# Altium PCB MCU098_MSPM0G3507_PCB.PcbDoc (part 3 of 5)
Units mil, origin at the board's own origin, x right, y up, seen from the top; angles counter-clockwise.
Board outline 2310.03 x 4205.03 mil, 4 copper layers (Top Layer, VCC Layer, GND Layer, Bottom Layer), stack 62.4 mil thick; 260 components, 182 nets, 835 pads, 237 vias.
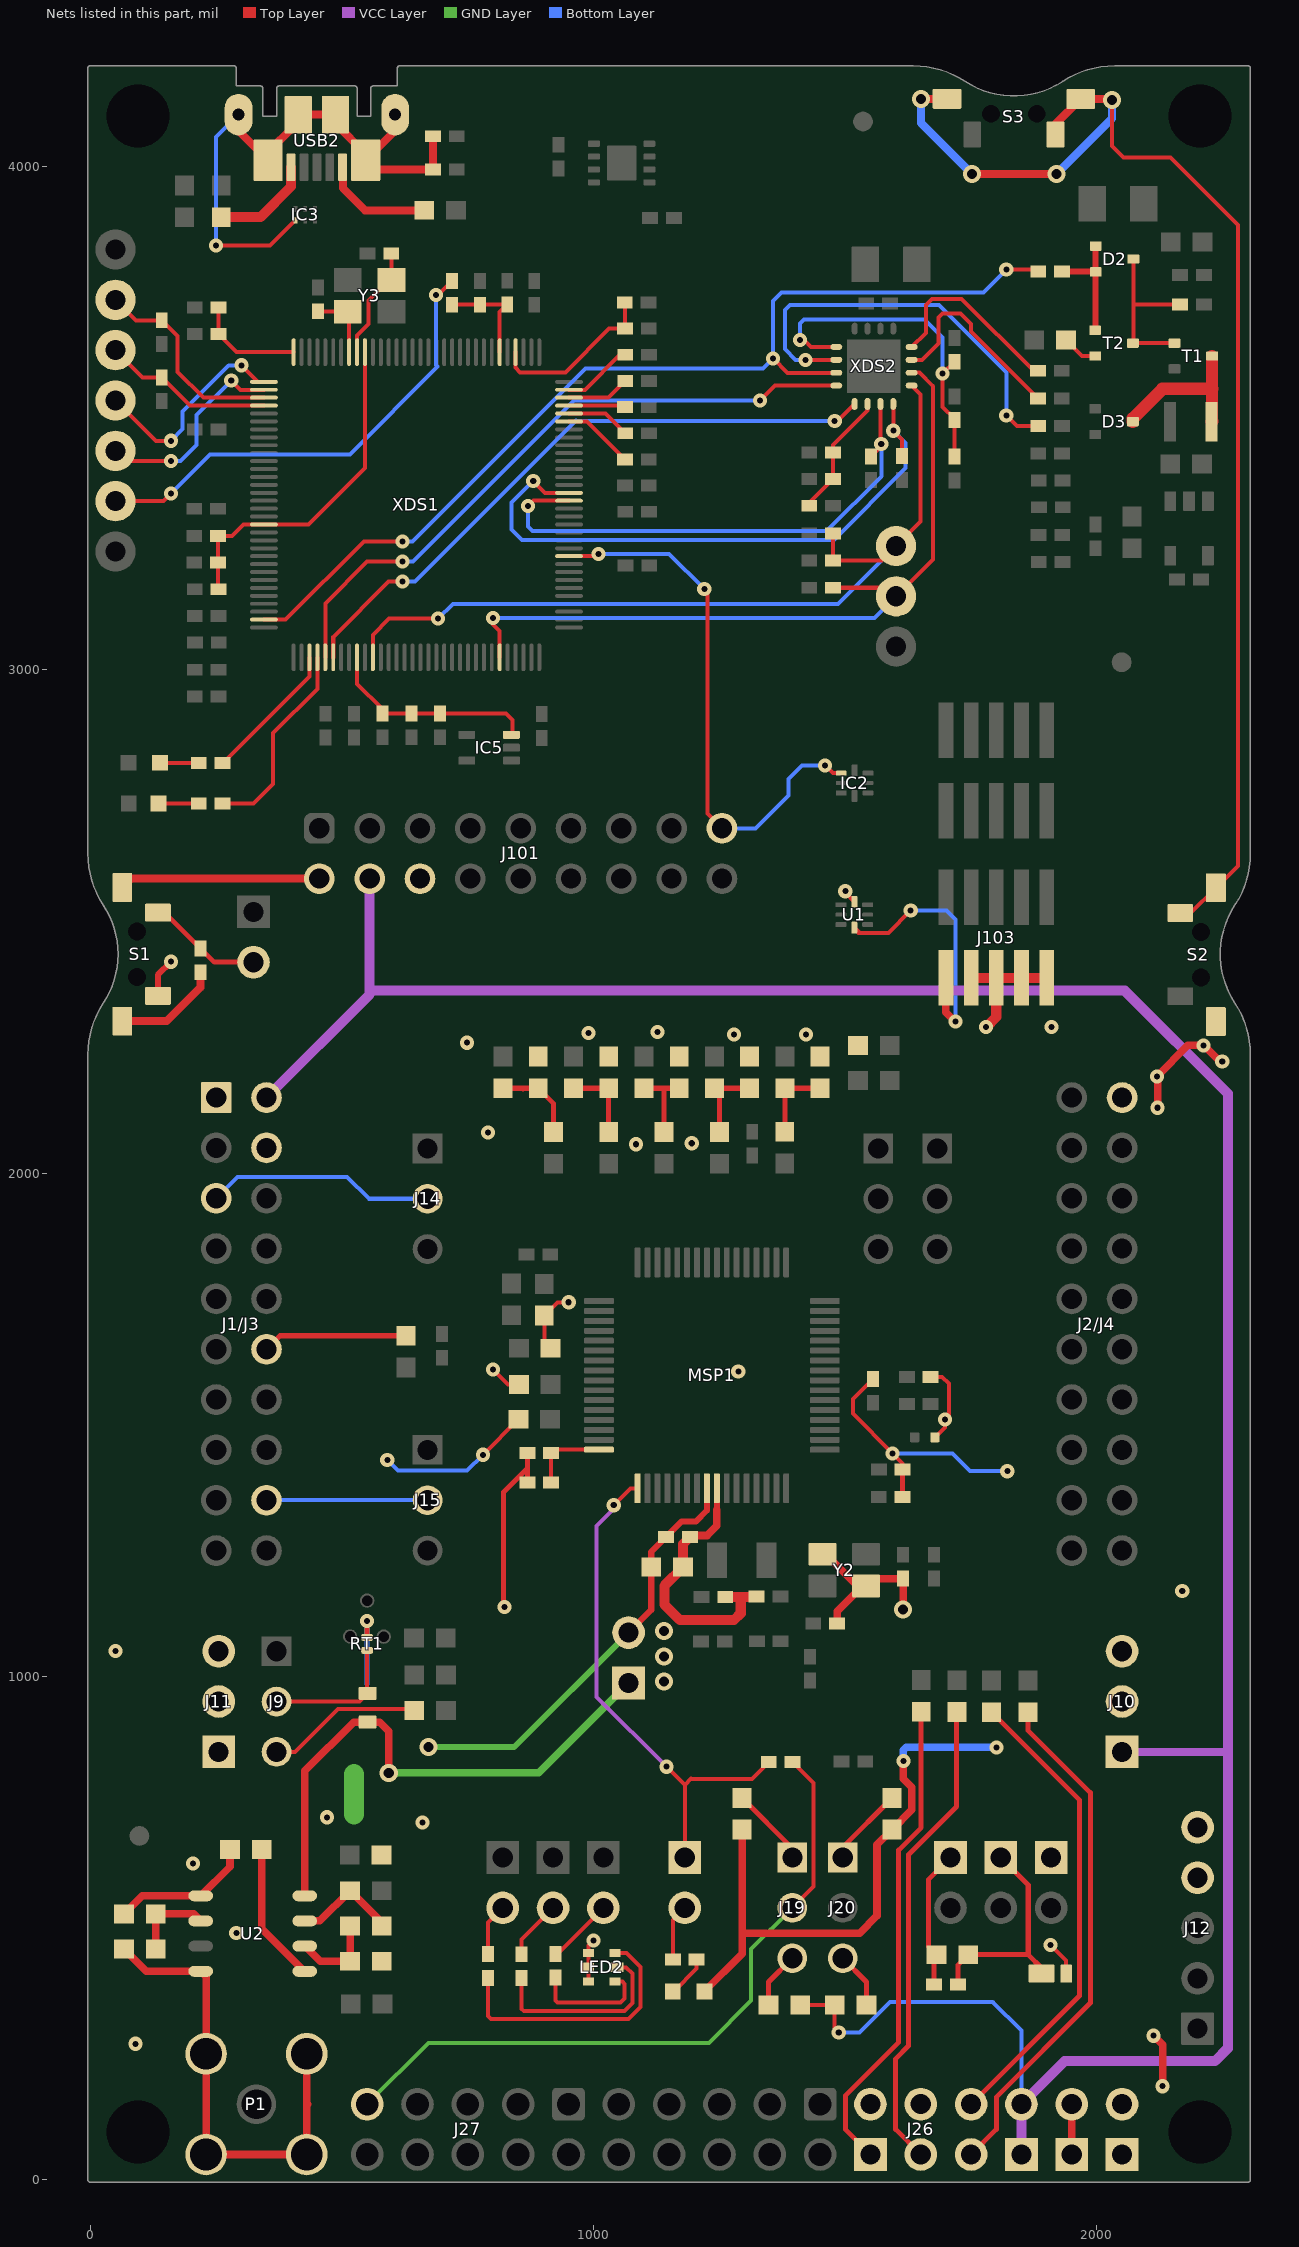
[diagram p4: the nets of this part, all layers, seen from the top]

## Part data (continued)
R24 R25 R26 R34: library part CMP-0026852-1, "RES, 1.0 k, 5%, 0.063 W, 0402", Manufacturer=Vishay-Dale, Power_W=63mW, Supplier Part Number 1=541-1.0KJCT-ND, TempCo="200 ppm/C", Tolerance_%=5%, Value2=0.063W, Value_Code=1k00, ValueDisplayed=1.0k, AEC Category=Q200, AEC Qualified=?, ComponentLink1Description="Datasheet link", ComponentLink1URL=http://www.vishay.com/docs/20035/dcrcwe3.pdf, CompType=Resistor, EIA_Code=E24, LatestRevisionDate=2017-03-09, MountType=SMT, PackageReference=0402, PartNumber=CRCW04021K00JNED, Published=2008-06-26, Publisher="Texas Instruments", Res_ohm=1k, RoHS=Y, SizeArea_mm2=0.5, SizeX_mm=1, SizeY_mm=0.5, SizeZ_mm=0.6, Supplier 1=Digi-Key, Supplier 2=Newark, Supplier 3=Mouser, Supplier Part Number 2=59M6691, Supplier Part Number 3=71-CRCW0402J-1.0K-E3, Technology="Thick Film", U/M=EA, Value1=5%, VDC_V=50V
R27: library part CMP-0026852-1, "RES, 1.0 k, 5%, 0.063 W, 0402", Manufacturer=Vishay-Dale, Power_W=63mW, Supplier Part Number 1=541-1.0KJCT-ND, TempCo="200 ppm/C", Tolerance_%=5%, Value2=0.063W, Value_Code=1k00, ValueDisplayed=DNC, AEC Category=Q200, AEC Qualified=?, ComponentLink1Description="Datasheet link", ComponentLink1URL=http://www.vishay.com/docs/20035/dcrcwe3.pdf, CompType=Resistor, EIA_Code=E24, LatestRevisionDate=2017-03-09, MountType=SMT, PackageReference=0402, PartNumber=CRCW04021K00JNED, Published=2008-06-26, Publisher="Texas Instruments", Res_ohm=1k, RoHS=Y, SizeArea_mm2=0.5, SizeX_mm=1, SizeY_mm=0.5, SizeZ_mm=0.6, Supplier 1=Digi-Key, Supplier 2=Newark, Supplier 3=Mouser, Supplier Part Number 2=59M6691, Supplier Part Number 3=71-CRCW0402J-1.0K-E3, Technology="Thick Film", U/M=EA, Value1=5%, VDC_V=50V
R28: library part CMP-0026824-3, "RES, 100, 5%, 0.063 W, AEC-Q200 Grade 0, 0402", Manufacturer=Vishay-Dale, Power_W=63mW, Supplier Part Number 1=541-100JCT-ND, TempCo="200 ppm/C", Tolerance_%=5%, Value2=0.063W, Value_Code=100R, ValueDisplayed=100, AEC Category=Q200, AEC Grade=0, AEC Qualified=Y, ComponentLink1Description="Datasheet link", ComponentLink1URL=http://www.vishay.com/docs/20035/dcrcwe3.pdf, CompType=Resistor, EIA_Code=E24, MountType=SMT, PackageReference=0402, PartNumber=CRCW0402100RJNED, Res_ohm=100, RoHS=E, SizeArea_mm2=0.5, SizeX_mm=1, SizeY_mm=0.5, SizeZ_mm=0.6, Supplier 1=Digi-Key, Supplier 2=Newark, Supplier 3=Mouser, Supplier Part Number 2=59M6700, Supplier Part Number 3=71-CRCW0402J-100-E3, Technology="Thick Film", Value1=5%, VDC_V=50V
R31 R91 R92: library part CMP-0026825-4, "RES, 10 k, 5%, 0.063 W, 0402", Manufacturer=Vishay-Dale, Power_W=63mW, Supplier Part Number 1=541-10KJCT-ND, TempCo="200 ppm/C", Tolerance_%=5%, Value2=0.063W, Value_Code=10k0, ValueDisplayed=10k, AEC Category=Q200, AEC Qualified=?, ComponentLink1Description="Datasheet link", ComponentLink1URL=http://www.vishay.com/docs/20035/dcrcwe3.pdf, CompType=Resistor, EIA_Code=E24, LatestRevisionDate=2017-03-09, MountType=SMT, PackageReference=0402, PartNumber=CRCW040210K0JNED, Published=2008-06-26, Publisher="Texas Instruments", Res_ohm=10k, RoHS=Y, SizeArea_mm2=0.5, SizeX_mm=1, SizeY_mm=0.5, SizeZ_mm=0.6, Supplier 1=Digi-Key, Supplier 2=Newark, Supplier 3=Mouser, Supplier Part Number 2=59M6696, Supplier Part Number 3=71-CRCW0402J-10K-E3, Technology="Thick Film", U/M=EA, Value1=5%, VDC_V=50V
R32: library part CMP-0026413-2, "RES, 4.87 k, 1%, 0.063 W, AEC-Q200 Grade 0, 0402", Manufacturer=Vishay-Dale, Power_W=63mW, Supplier Part Number 1=541-4.87KLCT-ND, TempCo="100 ppm/C", Tolerance_%=1%, Value2=0.063W, Value_Code=4k87, ValueDisplayed=4.87k, AEC Category=Q200, AEC Grade=0, AEC Qualified=Y, ComponentLink1Description="Datasheet link", ComponentLink1URL=http://www.vishay.com/docs/20035/dcrcwe3.pdf, CompType=Resistor, EIA_Code=E96, MountType=SMT, PackageReference=0402, PartNumber=CRCW04024K87FKED, Res_ohm=4.87k, RoHS=E, SizeArea_mm2=0.5, SizeX_mm=1, SizeY_mm=0.5, SizeZ_mm=0.6, Supplier 1=Digi-Key, Supplier 2=Newark, Supplier 3=Mouser, Supplier Part Number 2=52K7047, Supplier Part Number 3=71-CRCW0402-4.87K-E3, Technology="Thick Film", Value1=1%, VDC_V=50V
R33: library part CMP-0026824-1, "RES, 100, 5%, 0.063 W, 0402", Manufacturer=Vishay-Dale, Power_W=63mW, Supplier Part Number 1=541-100JCT-ND, TempCo="200 ppm/C", Tolerance_%=5%, Value2=0.063W, Value_Code=100R, ValueDisplayed=100, AEC Category=Q200, AEC Qualified=?, ComponentLink1Description="Datasheet link", ComponentLink1URL=http://www.vishay.com/docs/20035/dcrcwe3.pdf, CompType=Resistor, EIA_Code=E24, LatestRevisionDate=2017-03-09, MountType=SMT, PackageReference=0402, PartNumber=CRCW0402100RJNED, Published=2008-06-26, Publisher="Texas Instruments", Res_ohm=100, RoHS=Y, SizeArea_mm2=0.5, SizeX_mm=1, SizeY_mm=0.5, SizeZ_mm=0.6, Supplier 1=Digi-Key, Supplier 2=Newark, Supplier 3=Mouser, Supplier Part Number 2=59M6700, Supplier Part Number 3=71-CRCW0402J-100-E3, Technology="Thick Film", U/M=EA, Value1=5%, VDC_V=50V
R35: library part CMP-0026946-3, "RES, 51, 5%, 0.063 W, AEC-Q200 Grade 0, 0402", Manufacturer=Vishay-Dale, Power_W=63mW, Supplier Part Number 1=541-51JCT-ND, TempCo="200 ppm/C", Tolerance_%=5%, Value2=0.063W, Value_Code=51R0, ValueDisplayed=51, AEC Category=Q200, AEC Grade=0, AEC Qualified=Y, ComponentLink1Description="Datasheet link", ComponentLink1URL=http://www.vishay.com/docs/20035/dcrcwe3.pdf, CompType=Resistor, EIA_Code=E24, MountType=SMT, PackageReference=0402, PartNumber=CRCW040251R0JNED, Res_ohm=51, RoHS=E, SizeArea_mm2=0.5, SizeX_mm=1, SizeY_mm=0.5, SizeZ_mm=0.6, Supplier 1=Digi-Key, Supplier 2=Newark, Supplier 3=Mouser, Supplier Part Number 2=72M6804, Supplier Part Number 3=71-CRCW0402J-51-E3, Technology="Thick Film", Value1=5%, VDC_V=50V
R36 R37 R43 R44 R51 R54 R88: library part CMP-0026728-1, "RES, 220 k, 1%, 0.0625 W, 0402", Manufacturer="Yageo America", Power_W=62.5mW, Supplier Part Number 1=311-220KLRCT-ND, TempCo="100 ppm/C", Tolerance_%=1%, Value2=0.0625W, Value_Code=220k, AEC Category=Q200, AEC Grade=N/A, AEC Qualified=N, ComponentLink1Description="Datasheet link", ComponentLink1URL=http://www.yageo.com/documents/recent/PYu-RC0402_51_RoHS_L_6_r.pdf, CompType=Resistor, LatestRevisionDate=2017-03-09, MountType=SMT, PackageReference=0402, PartNumber=RC0402FR-07220KL, Published=2008-06-26, Publisher="Texas Instruments", Res_ohm=220k, RoHS=Y, SizeArea_mm2=0.5, SizeX_mm=1, SizeY_mm=0.5, SizeZ_mm=0.6, Supplier 1=Digi-Key, Supplier 2=Newark, Supplier 3=Mouser, Supplier Part Number 2=98K7527, Supplier Part Number 3=603-RC0402FR-07220KL, Technology="Thick Film", U/M=EA, Value1=1%, ValueDisplayed=220k, VDC_V=50V
R38 R85: library part CMP-0026695-1, "RES, 3.30 k, 1%, 0.1 W, AEC-Q200 Grade 0, 0402", Manufacturer=Panasonic, Power_W=100mW, Supplier Part Number 1=P3.30KLCT-ND, TempCo="100 ppm/C", Tolerance_%=1%, Value2=0.1W, Value_Code=3k30, ValueDisplayed=3.30k, AEC Category=Q200, AEC Grade=0, AEC Qualified=Y, ComponentLink1Description="Datasheet link", ComponentLink1URL=http://industrial.panasonic.com/cdbs/www-data/pdf/RDA0000/AOA0000C86.pdf, CompType=Resistor, LatestRevisionDate=2017-03-09, MountType=SMT, PackageReference=0402, PartNumber=ERJ-2RKF3301X, Published=2008-06-26, Publisher="Texas Instruments", Res_ohm=3.3k, RoHS=Y, SizeArea_mm2=0.5, SizeX_mm=1, SizeY_mm=0.5, SizeZ_mm=0.6, Supplier 1=Digi-Key, Supplier 2=Newark, Supplier 3=Mouser, Supplier Part Number 2=64R5278, Supplier Part Number 3=667-ERJ-2RKF3301X, Technology="Thick Film", U/M=EA, Value1=1%, VDC_V=50V
R39: library part CMP-0026231-1, "RES, 2.20 k, 1%, 0.063 W, 0402", Manufacturer=Vishay-Dale, Power_W=63mW, Supplier Part Number 1=541-2.20KLCT-ND, TempCo="100 ppm/C", Tolerance_%=1%, Value2=0.063W, Value_Code=2k20, ValueDisplayed=2.20k, AEC Category=Q200, AEC Qualified=?, ComponentLink1Description="Datasheet link", ComponentLink1URL=http://www.vishay.com/docs/20035/dcrcwe3.pdf, CompType=Resistor, LatestRevisionDate=2017-03-09, MountType=SMT, PackageReference=0402, PartNumber=CRCW04022K20FKED, Published=2008-06-26, Publisher="Texas Instruments", Res_ohm=2.2k, RoHS=Y, SizeArea_mm2=0.5, SizeX_mm=1, SizeY_mm=0.5, SizeZ_mm=0.6, Supplier 1=Digi-Key, Supplier 2=Newark, Supplier 3=Mouser, Supplier Part Number 2=26W9020, Supplier Part Number 3=71-CRCW0402-2.2K-E3, Technology="Thick Film", U/M=EA, Value1=1%
R40: library part CMP-0026517-1, "RES, 6.81 k, 1%, 0.063 W, 0402", Manufacturer=Vishay-Dale, Power_W=63mW, Supplier Part Number 1=541-6.81KLCT-ND, TempCo="100 ppm/C", Tolerance_%=1%, Value2=0.063W, Value_Code=6k81, ValueDisplayed=6.81k, AEC Category=Q200, AEC Qualified=?, ComponentLink1Description="Datasheet link", ComponentLink1URL=http://www.vishay.com/docs/20035/dcrcwe3.pdf, CompType=Resistor, EIA_Code=E96, LatestRevisionDate=2017-03-09, MountType=SMT, PackageReference=0402, PartNumber=CRCW04026K81FKED, Published=2008-06-26, Publisher="Texas Instruments", Res_ohm=6.81k, RoHS=Y, SizeArea_mm2=0.5, SizeX_mm=1, SizeY_mm=0.5, SizeZ_mm=0.6, Supplier 1=Digi-Key, Supplier 2=Newark, Supplier 3=Mouser, Supplier Part Number 2=52K7188, Supplier Part Number 3=71-CRCW0402-6.81K-E3, Technology="Thick Film", U/M=EA, Value1=1%, VDC_V=50V
R41 R42: library part CMP-0026938-1, "RES, 4.7 k, 5%, 0.063 W, 0402", Manufacturer=Vishay-Dale, Power_W=63mW, Supplier Part Number 1=541-4.7KJCT-ND, TempCo="200 ppm/C", Tolerance_%=5%, Value2=0.063W, Value_Code=4k70, ValueDisplayed=4.7k, AEC Category=Q200, AEC Qualified=?, ComponentLink1Description="Datasheet link", ComponentLink1URL=http://www.vishay.com/docs/20035/dcrcwe3.pdf, CompType=Resistor, EIA_Code=E24, LatestRevisionDate=2017-03-09, MountType=SMT, PackageReference=0402, PartNumber=CRCW04024K70JNED, Published=2008-06-26, Publisher="Texas Instruments", Res_ohm=4.7k, RoHS=Y, SizeArea_mm2=0.5, SizeX_mm=1, SizeY_mm=0.5, SizeZ_mm=0.6, Supplier 1=Digi-Key, Supplier 2=Newark, Supplier 3=Mouser, Supplier Part Number 2=59M6733, Supplier Part Number 3=71-CRCW0402J-4.7K-E3, Technology="Thick Film", U/M=EA, Value1=5%, VDC_V=50V
R45 R46 R49: library part CMP-0026737-1, "RES, 47.0 k, 1%, 0.0625 W, 0402", Manufacturer="Yageo America", Power_W=62.5mW, Supplier Part Number 1=311-47.0KLRCT-ND, TempCo="100 ppm/C", Tolerance_%=1%, Value2=0.0625W, Value_Code=47k0, ValueDisplayed=47.0k, AEC Category=Q200, AEC Grade=N/A, AEC Qualified=N, ComponentLink1Description="Datasheet link", ComponentLink1URL=http://www.yageo.com/documents/recent/PYu-RC0402_51_RoHS_L_6_r.pdf, CompType=Resistor, LatestRevisionDate=2017-03-09, MountType=SMT, PackageReference=0402, PartNumber=RC0402FR-0747KL, Published=2008-06-26, Publisher="Texas Instruments", Res_ohm=47k, RoHS=Y, SizeArea_mm2=0.5, SizeX_mm=1, SizeY_mm=0.5, SizeZ_mm=0.6, Supplier 1=Digi-Key, Supplier 2=Newark, Supplier 3=Mouser, Supplier Part Number 2=67R9937, Supplier Part Number 3=603-RC0402FR-0747KL, Technology="Thick Film", U/M=EA, Value1=1%, VDC_V=50V
R47: library part CMP-0026743-1, "RES, 820, 1%, 0.063 W, 0402", Manufacturer="Yageo America", Power_W=63mW, Supplier Part Number 1=311-820LRCT-ND, TempCo="100 ppm/C", Tolerance_%=1%, Value2=0.063W, Value_Code=820R, ValueDisplayed=820, AEC Category=Q200, AEC Grade=N/A, AEC Qualified=N, ComponentLink1Description="Datasheet link", ComponentLink1URL=http://www.yageo.com/documents/recent/PYu-RC_Group_51_RoHS_L_04.pdf, CompType=Resistor, LatestRevisionDate=2017-03-09, MountType=SMT, PackageReference=0402, PartNumber=RC0402FR-07820RL, Published=2008-06-26, Publisher="Texas Instruments", Res_ohm=820, RoHS=Y, SizeArea_mm2=0.5, SizeX_mm=1, SizeY_mm=0.5, SizeZ_mm=0.6, Supplier 1=Digi-Key, Supplier 2=Newark, Supplier 3=Mouser, Supplier Part Number 2=26M6794, Supplier Part Number 3=603-RC0402FR-07820RL, Technology="Thick Film", U/M=EA, Value1=1%, VDC_V=50V
R48: library part CMP-0026934-1, "RES, 470, 5%, 0.063 W, 0402", Manufacturer=Vishay-Dale, Power_W=63mW, Supplier Part Number 1=541-470JCT-ND, TempCo="200 ppm/C", Tolerance_%=5%, Value2=0.063W, Value_Code=470R, ValueDisplayed=470, AEC Category=Q200, AEC Qualified=?, ComponentLink1Description="Datasheet link", ComponentLink1URL=http://www.vishay.com/docs/20035/dcrcwe3.pdf, CompType=Resistor, EIA_Code=E24, LatestRevisionDate=2017-03-09, MountType=SMT, PackageReference=0402, PartNumber=CRCW0402470RJNED, Published=2008-06-26, Publisher="Texas Instruments", Res_ohm=470, RoHS=Y, SizeArea_mm2=0.5, SizeX_mm=1, SizeY_mm=0.5, SizeZ_mm=0.6, Supplier 1=Digi-Key, Supplier 2=Newark, Supplier 3=Mouser, Supplier Part Number 2=59M6737, Supplier Part Number 3=71-CRCW0402J-470-E3, Technology="Thick Film", U/M=EA, Value1=5%, VDC_V=50V
R50 R53: library part CMP-0026728-1, "RES, 220 k, 1%, 0.0625 W, 0402", Manufacturer="Yageo America", Power_W=62.5mW, Supplier Part Number 1=311-220KLRCT-ND, TempCo="100 ppm/C", Tolerance_%=1%, Value2=0.0625W, Value_Code=220k, ValueDisplayed=DNC, AEC Category=Q200, AEC Grade=N/A, AEC Qualified=N, ComponentLink1Description="Datasheet link", ComponentLink1URL=http://www.yageo.com/documents/recent/PYu-RC0402_51_RoHS_L_6_r.pdf, CompType=Resistor, LatestRevisionDate=2017-03-09, MountType=SMT, PackageReference=0402, PartNumber=RC0402FR-07220KL, Published=2008-06-26, Publisher="Texas Instruments", Res_ohm=220k, RoHS=Y, SizeArea_mm2=0.5, SizeX_mm=1, SizeY_mm=0.5, SizeZ_mm=0.6, Supplier 1=Digi-Key, Supplier 2=Newark, Supplier 3=Mouser, Supplier Part Number 2=98K7527, Supplier Part Number 3=603-RC0402FR-07220KL, Technology="Thick Film", U/M=EA, Value1=1%, VDC_V=50V
R52 R55 R57 R58 R62 R63 R64 R65 R69 R71 R73 R75 R76 R77 R78 R79 R80 R81 R82 R83 R84 R86 R89: library part CMP-0025885-5, "RES, 0, 5%, 0.1 W, 0603", Manufacturer=Yageo, Power_W=100mW, Supplier Part Number 1=311-0.0GRCT-ND, TempCo="200 ppm/C", Tolerance_%=5%, Value2=0.1W, Value_Code=0000, ValueDisplayed=0, AEC Category=Q200, AEC Grade=N/A, AEC Qualified=N, ComponentLink1Description="Datasheet link", ComponentLink1URL=http://www.yageo.com/pdf/Pu-RC0603_51_PbFree_L_2.pdf, CompType=Resistor, EIA_Code=E24, MountType=SMT, PackageReference=0603, PartNumber=RC0603JR-070RL, Res_ohm=0, RoHS=Y, SizeArea_mm2=1.28, SizeAreaWB_mm2=4.68, SizeX_mm=1.6, SizeY_mm=0.8, SizeZ_mm=1, Supplier 1=Digi-Key, Supplier 2=Mouser, Supplier 3=Farnell, Supplier Part Number 2=603-RC0603JR-070RL, Supplier Part Number 3=9233130, Technology="Thick Film", Value1=5%, VDC_V=75V
R56: library part CMP-0080084-1, "RES, 10.0 k, 0.1%, 0.1 W, AEC-Q200 Grade 0, 1.6x0.8mm", Manufacturer=Panasonic, Power_W=100mW, Supplier Part Number 1=P10KBDCT-ND, TempCo="10 ppm/C", Tolerance_%=0.1%, Value2=0.1W, Value_Code=10k0, ValueDisplayed=10.0k, AEC Category=Q200, AEC Grade=0, AEC Qualified=Y, ComponentLink1Description="Datasheet link", ComponentLink1URL=https://industrial.panasonic.com/cdbs/www-data/pdf/RDM0000/AOA0000C307.pdf, CompType=Resistor, MountType=SMT, PackageReference=1.6x0.8mm, PartNumber=ERA3ARB103V, Res_ohm=10k, RoHS=Y, SizeArea_mm2=1.28, SizeAreaWB_mm2=4.68, SizeX_mm=1.6, SizeY_mm=0.8, SizeZ_mm=0.55, Supplier 1=Digi-Key, Supplier 2=Newark, Supplier 3=Mouser, Supplier Part Number 2=62W8891, Supplier Part Number 3=667-ERA-3ARB103V, Technology="Thin Film", Value1=0.1%, VDC_V=150V
R59 R60: library part CMP-0026938-5, "RES, 4.7 k, 5%, 0.063 W, AEC-Q200 Grade 0, 0402", Manufacturer=Vishay-Dale, Power_W=63mW, Supplier Part Number 1=541-4.7KJCT-ND, TempCo="200 ppm/C", Tolerance_%=5%, Value2=0.063W, Value_Code=4k70, ValueDisplayed=DNC, AEC Category=Q200, AEC Grade=0, AEC Qualified=Y, ComponentLink1Description="Datasheet link", ComponentLink1URL=http://www.vishay.com/docs/20035/dcrcwe3.pdf, CompType=Resistor, EIA_Code=E24, MountType=SMT, PackageReference=0402, PartNumber=CRCW04024K70JNED, Res_ohm=4.7k, RoHS=E, SizeArea_mm2=0.5, SizeX_mm=1, SizeY_mm=0.5, SizeZ_mm=0.6, Supplier 1=Digi-Key, Supplier 2=Newark, Supplier 3=Mouser, Supplier Part Number 2=59M6733, Supplier Part Number 3=71-CRCW0402J-4.7K-E3, Technology="Thick Film", Value1=5%, VDC_V=50V
R72: library part CMP-0022736-4, "RES, 100, 1%, 0.1 W, 0603", Manufacturer=Yageo, Power_W=100mW, Supplier Part Number 1=311-100HRCT-ND, TempCo="100 ppm/C", Tolerance_%=1%, Value2=0.1W, Value_Code=100R, ValueDisplayed=100, AEC Category=Q200, AEC Grade=N/A, AEC Qualified=N, ComponentLink1Description="Datasheet link", ComponentLink1URL=http://www.yageo.com/pdf/Pu-RC0603_51_PbFree_L_2.pdf, CompType=Resistor, EIA_Code=E96, MountType=SMT, PackageReference=0603, PartNumber=RC0603FR-07100RL, Res_ohm=100, RoHS=Y, SizeArea_mm2=1.28, SizeAreaWB_mm2=4.68, SizeX_mm=1.6, SizeY_mm=0.8, SizeZ_mm=1, Supplier 1=Digi-Key, Supplier 2=Mouser, Supplier 3=Farnell, Supplier Part Number 2=603-RC0603FR-07100RL, Supplier Part Number 3=9238360, Technology="Thick Film", Value1=1%, VDC_V=75V
R87: library part CMP-0026731-1, "RES, 330 k, 1%, 0.0625 W, 0402", Manufacturer="Yageo America", Power_W=62.5mW, Supplier Part Number 1=311-330KLRCT-ND, TempCo="100 ppm/C", Tolerance_%=1%, Value2=0.0625W, Value_Code=330k, AEC Category=Q200, AEC Grade=N/A, AEC Qualified=N, ComponentLink1Description="Datasheet link", ComponentLink1URL=http://www.yageo.com/documents/recent/PYu-RC0402_51_RoHS_L_6_r.pdf, CompType=Resistor, LatestRevisionDate=2017-03-09, MountType=SMT, PackageReference=0402, PartNumber=RC0402FR-07330KL, Published=2008-06-26, Publisher="Texas Instruments", Res_ohm=330k, RoHS=Y, SizeArea_mm2=0.5, SizeX_mm=1, SizeY_mm=0.5, SizeZ_mm=0.6, Supplier 1=Digi-Key, Supplier 2=Newark, Supplier 3=Mouser, Supplier Part Number 2=98K7541, Supplier Part Number 3=603-RC0402FR-07330KL, Technology="Thick Film", U/M=EA, Value1=1%, ValueDisplayed=330k, VDC_V=50V
R90: library part CMP-0026100-1, "RES, 1.00 M, 1%, 0.063 W, 0402", Manufacturer=Vishay-Dale, Power_W=63mW, Supplier Part Number 1=541-1.00MLCT-ND, TempCo="100 ppm/C", Tolerance_%=1%, Value2=0.063W, Value_Code=1M00, ValueDisplayed=1.00M, AEC Category=Q200, AEC Qualified=?, ComponentLink1Description="Datasheet link", ComponentLink1URL=http://www.vishay.com/docs/20035/dcrcwe3.pdf, CompType=Resistor, EIA_Code=E96, LatestRevisionDate=2017-03-09, MountType=SMT, PackageReference=0402, PartNumber=CRCW04021M00FKED, Published=2008-06-26, Publisher="Texas Instruments", Res_ohm=1M, RoHS=Y, SizeArea_mm2=0.5, SizeX_mm=1, SizeY_mm=0.5, SizeZ_mm=0.6, Supplier 1=Digi-Key, Supplier 2=Newark, Supplier 3=Mouser, Supplier Part Number 2=52K6593, Supplier Part Number 3=71-CRCW0402-1.0M-E3, Technology="Thick Film", U/M=EA, Value1=1%, VDC_V=50V
RT1: library part CMP-0084565-1, "Thermistor, DEC0002A (X1SON-2)", Alternate Manufacturer="Texas Instruments", Alternate PartNumber=TMP6131DECR, AEC Category=Q200, AEC Qualified=N, ComponentLink1Description="Datasheet Link", ComponentLink1URL=http://www.ti.com/lit/ds/symlink/tmp6.pdf, ComponentLink2Description="Product Folder", ComponentLink2URL=http://www.ti.com/product/tmp6, ComponentLink3Description="Online Datasheet", ComponentLink3URL=http://www.ti.com/product/tmp6/datasheet, CompType=IC, Manufacturer="Texas Instruments", MountType=SMT, PackageDescription=X1SON-2, PackageReference=DEC0002A, PartNumber=TMP6131DECT, SizeArea_mm2=0.6, SizeAreaWB_mm2=3.2, SizeX_mm=1, SizeY_mm=0.6, SizeZ_mm=0.5
S1 S2 S3: library part CMP-0002328-1, "Switch, SPST, 0.05 A, 12 VDC, SMD", CurrentRating_mA=50A, Manufacturer=Diptronics, Circuit=SPST, ComponentLink1Description="Datasheet URL", ComponentLink1URL=http://www.dip.com.tw/en/en-product-information/en-switch004/item/download/1976_b080c057386714e3a6604cbe658b9df3, CompType=Switch, LatestRevisionDate=2017-03-09, MountType=SMT, Orientation="Side Actuated", PackageReference=7.8x3.5mm, PartNumber=1188E-1K2-V-TR, PositionCount=1, Publisher="Texas Instruments", RoHS=Y, SizeArea_mm2=27.3, SizeAreaWB_mm2=53.9, SizeX_mm=7.8, SizeY_mm=3.5, SizeZ_mm=3.5, VDC_V=12V
SH-J1 SH-J2 SH-J3 SH-J4 SH-J5 SH-J6 SH-J7 SH-J8 SH-J9 SH-J10 SH-J11 SH-J12 SH-J13 SH-J14 SH-J15 SH-J16 SH-J17 SH-J18 SH-J19 SH-J20 SH-J21 SH-J22 SH-J23 SH-J24 SH-J25: library part CMP-0003623-3, "Shunt, 100mil, Gold plated, Black", Alternate Manufacturer=3M, Alternate PartNumber=969102-0000-DA, Manufacturer=Samtec, Supplier Part Number 1=SAM8858-ND, ClassName=Shunt, ComponentLink1Description="Datasheet Link", ComponentLink1URL=http://www.samtec.com/ftppub/pdf/SNT.PDF, CompType=Shunt, MountType=N/A, PackageReference=Shunt, PartNumber=SNT-100-BK-G, RoHS=Y, Supplier 1=Digi-Key
T1: library part CMP-0000035-1, "MOSFET, P-CH, -20 V, -0.82 A, SOT-323", Alternate Manufacturer=None, Manufacturer="Diodes Inc.", Supplier Part Number 1=DMG1013UW-7DICT-ND, Value1=0.7, Value2="0.622 nC", AEC Category=Q101, AEC Qualified=?, ChType=P, ComponentLink1Description="Datasheet link", ComponentLink1URL=http://www.diodes.com/datasheets/ds31861.pdf, CompType=MOSFET, IdsMax_A=-820mA, LatestRevisionDate=2017-03-09, LatestRevisionNote="Added parts.", MountType=SMT, PackageReference=SOT-323, PartNumber=DMG1013UW-7, Published=2008-06-19, Publisher="Texas Instruments", QgTyp_nC=0.622, Rdson45_ohm=0.75, RoHS=Y, SizeArea_mm2=4.84, SizeAreaWB_mm2=10.24, SizeX_mm=2.2, SizeY_mm=2.2, SizeZ_mm=1.1, Supplier 1=Digi-Key, Supplier 2=Mouser, Supplier Part Number 2=621-DMG1013UW-7, U/M=EA, VdsMax_V=-20V, Vgs_V=-6V
T2: library part CMP-0000466-1, "Transistor, NPN, 45 V, 0.1 A, SOT-323", Manufacturer="NXP Semiconductor", Supplier Part Number 1=568-6076-1-ND, Value1="0.1 A", Value2=800, AEC Category=Q101, AEC Qualified=?, ComponentLink1Description="Datasheet link", ComponentLink1URL=http://www.nxp.com/documents/data_sheet/BC849W_850W.pdf, CompType=BJT, HfeMax=800, IcRated_A=100mA, LatestRevisionDate=2017-03-09, MountType=SMT, NPN=1, PackageReference=SOT-323, PartNumber=BC850CW,115, PNP=0, Published=2008-07-31, Publisher="Texas Instruments", RoHS=Y, SizeArea_mm2=4.84, SizeAreaWB_mm2=10.24, SizeX_mm=2.2, SizeY_mm=2.2, SizeZ_mm=1.1, Supplier 1=Digi-Key, Supplier 2=Newark, Supplier 3=Mouser, Supplier Part Number 2=75R0746, Supplier Part Number 3=771-BC850CW-T/R, TaMax_C=150°C, TaMin_C=-65°C, U/M=EA, Vceo_V=45V, Vcesat1_V=250mV
TP1 TP2 TP3 TP4 TP5 TP6 TP7 TP8 TP9 TP10: library part CMP-0055138-1, "Test Point, Miniature, Black, TH", Color=Black, Manufacturer=Keystone, Supplier Part Number 1=36-5001-ND, CNHeader=FALSE, ComponentLink1Description="Datasheet URL", ComponentLink1URL=http://www.keyelco.com/userAssets/file/M60-2p60.pdf, CompType="Test Point", ContactFinish=Silver, CT=TRUE, Green_EU RoHS=Passed, Green_EU RoHS-2=Incomplete, Green_Lifecycle=Active, Green_REACh=Passed, LatestRevisionDate=26/05/2017, MountType=TH, PackageReference="Black Miniature Testpoint", PartNumber=5001, Publisher="Texas Instruments", RoHS=Y, Supplier 1=Digi-Key, Supplier 2=Mouser, Supplier Part Number 2=534-5001
  TP1 TP2 TP3 TP4: Display=DNC
  TP5 TP6 TP7 TP8 TP9 TP10: Dispaly=DNC
U2: library part CMP-0040798-2, "50 MHz, Low-Noise Single-Supply Rail-to-Rail Operational Amplifier, 2.2 to 5.5 V, -40 to 125 degC, 8-pin SOIC (D8), Green (RoHS & no Sb/Br)", Manufacturer="Texas Instruments", Total Supply Voltage(Max)(+5V is 5, +/-5V is 10)=5.5, Total Supply Voltage(Min)(+5V is 5, +/-5V is 10)=2.2, CMRR(Min)(dB)=100, Code_JEDEC=MS-012, ComponentLink1Description="Manufacturer URL", ComponentLink1URL=http://www.ti.com/, ComponentLink2Description=Datasheet, ComponentLink2URL=http://www.ti.com/general/docs/lit/getliterature.tsp?genericPartNumber=OPA2365&fileType=pdf, ComponentLink3Description="Package Specification", ComponentLink3URL=http://www.ti.com/litv/pdf/msoi002j, DatasheetVersion=SBOS365D, Eco-Plan="Green (RoHS & no Sb/Br)", IIB(Max)(pA)=10, Iq per channel(Max)(mA)=5, Mounting Technology="Surface Mount", Number of Channels=2, Offset Drift(Typ)(uV/C)=1, PackageDescription="8-Pin Plastic Small Outline, Body 4.9 x 3.9 mm, Pitch 1.27 mm", PackageReference=D0008A, PackageVersion="4040047-3/M, 06/2011", PartId=1, PartNumber=OPA2365AIDR, Slew Rate(Typ)(V/us)=25, Sub Family="High Speed Amplifier (>=50MHz), Low Input Bias Current Amp (<=10pA), Low Offset Voltage Amplifier (<=500uV), Low Supply Voltage Amplifier (<=2.7V)", Vio (25C)(Max)(mV)=0.2
USB2: library part CMP-0055311-1, "Receptacle, USB 2.0, Micro B, 5 Position, R/A, SMT", Color=Black, Current_A=1.8A, Manufacturer=Molex, Supplier Part Number 1=WM11263CT-ND, Voltage_V=30V, Cert_UL=Y, CNHeader=FALSE, ComponentLink1Description="Datasheet URL", ComponentLink1URL=http://www.molex.com/pdm_docs/sd/1051640001_sd.pdf, CompType=USB, ContactFinish=Gold, CT=TRUE, Gender=Female, LatestRevisionDate=26/05/2017, MountType=SMT, Orientation=R/A, PackageReference="Receptacle, USB 2.0, Micro B, 5 Pos, 0.65mm Pitch, R/A, SMT", PartNumber=1051640001, PinCount=5, Pitch_mm=0.65, Publisher="Texas Instruments", RoHS=Y, Supplier 1=Digi-Key, Supplier 2=Newark, Supplier 3=Mouser, Supplier Part Number 2=99Y3224, Supplier Part Number 3=538-105164-0001
XDS1: library part CMP-0077954-1, "MSP432E401YTPDT, PDT0128A (TQFP-128)", Alternate Manufacturer="Texas Instruments", Alternate PartNumber=MSP432E401YTPDT, AEC Category=Q200, AEC Qualified=N, ComponentLink1Description="Datasheet Link", ComponentLink1URL=http://www.ti.com/lit/ds/symlink/tm4c129encpdt.pdf, ComponentLink2Description="Product Folder", ComponentLink2URL=TBD, CompType=IC, Manufacturer="Texas Instruments", MountType=SMT, PackageDescription=TQFP-128, PackageReference=PDT0128A, PartId=1, PartNumber=MSP432E401YTPDTR, SizeArea_mm2=256, SizeAreaWB_mm2=324, SizeX_mm=16, SizeY_mm=16, SizeZ_mm=1.2
XDS2: library part CMP-0039611-2, "MSP430G2x52, MSP430G2x12 Mixed Signal Microcontroller, RSA0016B (VQFN-16)", Alternate PartNumber=MSP430G2452IRSA16T, Frequency(MHz)=16, Manufacturer="Texas Instruments", Operating Temperature Range="-40 to 85 C", Rating=Catalog, Temp Sensor=Yes, ADC="10-bit SAR", ADC Channels=8, AEC Category=Q200, AEC Qualified=N, Brown Out Reset=Yes, Cap touch I/O=Yes, Code_JEDEC=MO-220, Comparators=Yes, ComponentLink1Description="Datasheet Link", ComponentLink1URL=http://www.ti.com/lit/ds/symlink/msp430g2452.pdf, ComponentLink2Description="Product Folder", ComponentLink2URL=http://www.ti.com/product/msp430g2452, ComponentLink3Description="Online Datasheet", ComponentLink3URL=http://www.ti.com/product/msp430g2452/datasheet, CompType=IC, DatasheetVersion=SLAS722E, Eco-Plan="Green (RoHS & no Sb/Br)", Flash(KB)=8, GPIO=16, MountType=SMT, PackageDescription=VQFN-16, PackageReference=RSA0016B, PartNumber=MSP430G2452IRSA16R, RoHS=Y, SizeArea_mm2=16, SizeAreaWB_mm2=25, SizeX_mm=4, SizeY_mm=4, SizeZ_mm=1, SRAM(B)=256, Timers - 16-bit=1, Watchdog=Yes
Y1: library part CMP-0004693-2, "Crystal, 32.768 KHz, 12.5 pF, SMD", Frequency_Fixed=32.768kHz, Manufacturer=Epson, ComponentLink1Description="Datasheet Link", ComponentLink1URL=https://support.epson.biz/td/api/doc_check.php?dl=brief_FC-135R_en.pdf, CompType=Crystal, LatestRevisionDate=18/04/2017, MountType=SMT, PackageReference="SMD, 2-Leads, Body 3.2x1.5mm", PartNumber=X1A0001410014, Publisher="Texas Instruments", RoHS=Y, TaMax_C=85°C, TaMin_C=-40°C, U/M=EA
Y2: library part CMP-0098168-2, "Crystal 40MHz ±10ppm (Tol) ±20ppm (Stability) 12pF FUND 40Ohm 4-Pin Mini-CSMD T/R", Frequency Stability=20ppm, Frequency Tolerance=10ppm, Frequency_Fixed=40MHz, Load Capacitance=12pF, Manufacturer="Seiko Epson", Operating Temperature Range="-40°C to +105°C", AEC Qualified=No, ComponentLink1Description=Datasheet, ComponentLink1URL=https://support.epson.biz/td/api/doc_check.php?mode=dl&lang=en&Parts=X1E0000210179, datasheet=https://support.epson.biz/td/api/doc_check.php?mode=dl&lang=en&Parts=X1E0000210179, Datasheet Path=datasheets/Crys-X1E0000210179.pdf, Esr=40, helpURL=https://upverter.com/upn/revision/08d7803d4c2c7fb7/, Lead Free=Yes, PackageReference=TSX-3225, Part Number=X1E0000210179, PartNumber=X1E0000210179, RoHS=TRUE, Series=TSX-3225, SizeZ_mm=0.6mm, Tolerance_%=10ppm
Y3: library part CMP-0004635-1, "Crystal, 16 MHz, 8pF, SMD", Frequency_Fixed=16MHz, Frequency Stability=+/-30ppm, Manufacturer=NDK, Supplier Part Number 1=644-1157-1-ND, ComponentLink1Description="Datasheet Link", ComponentLink1URL=http://www.ndk.com/images/products/catalog/c_NX3225GA-STD-CRG-1_e.pdf, CompType=Crystal, LatestRevisionDate=18/04/2017, MountType=SMT, PackageReference=3.2x0.75x2.5mm, PartNumber=NX3225GA-16.000M-STD-CRG-1, Publisher="Texas Instruments", RoHS=Y, Supplier 1=Digi-Key, TaMax_C=70°C, TaMin_C=-10°C, U/M=EA
ZZ2 ZZ3 ZZ4: library part AssemblyNote, Alternate Manufacturer=-, Alternate PartNumber=-, ClassName=AssemblyNote, CompType=AssemblyNote, LatestRevisionDate=2012-06-14, LatestRevisionNote="Initial Version", Publisher="Texas Instruments", SymbolCreator=codlsc, SymbolVersion=2010-05-18

## Free pads (board coordinates)
  round 0 hole 21 slot 162 at 90 deg unplated: 1(516,1079.25) 1(583,1079)
  round 0 hole 21 slot 87 at 0 deg unplated: 1(550,1150.56)

## Via types
v1: diameter 28, hole 12, Top Layer to Bottom Layer, 211 vias
v2: diameter 36, hole 20, Top Layer to Bottom Layer, 17 vias
v3: diameter 19.68, hole 7.87, Top Layer to Bottom Layer, 9 vias

## Nets (pads, with @x,y where several pads share a name; then routed paths per layer and width w, separated by ;. In a path a pad name is that pad's centre, name@x,y a point inside that pad or via, vN(x,y) a via of type N, cw(c..) or ccw(c..) an arc to the next point about the centre after c; other vN are vias at no path point)
3.3VM: J13.1 R56.2 U2.8 | length 1096
  Top Layer w15: U2.8@426.01,563.99 426.01,812.06 523.15,909.21 R56.2@551,909.21 574.87,909.21 592.88,891.2 v2(592.88,808.35)
  GND Layer w15: v2(592.88,808.35) 890.72,808.35 J13.1@1069.38,987
3V3: C1.1 C2.1 J1/J3.1 J11.1 J12.4 J13.2 J25.1 J25.2 J101.6 J103.1 LED1.1 MSP1.40 R2.2 R18.2 R21.2 R59.1 R60.1 R66.1 S1.4 U1.8 | length 3942.6
  Top Layer w8: v1(779.81,1440.28) R66.1@850.5,1511 ; LED1.1@1218.31,374 LED1.1@1219.3,374.98 ; U1.8@1517.93,2487.9 1525.82,2480 1525.82,2477.01 1585.51,2477.01 v1(1630,2521.5) ; R2.2@1555,1591 1514.9,1550.9 1514.9,1522.1 v1(1594,1443) 1613.62,1423.38 R60.1@1613.62,1410.66
  Top Layer w10: R59.1@1613.62,1356.35 R60.1@1613.62,1410.66
  Top Layer w12: S1.4@134.34,2352.05 134.34,2393.76 v1(160.5,2419.92) ; J13.2@1069.38,1087 1114.5,1132.13 C1.1@1114.5,1217 1114.5,1247.47 C2.1@1144.03,1277 1175.03,1308 1203.65,1308 1225.16,1329.5 MSP1.40@1225.16,1373.59
  Top Layer w15: LED1.1@1220.28,374 1295,448.72 1295,490 ; R18.2@1295,695.5 1295,490 ; v1(1615.38,831.7) 1615.38,796.62 1632.2,779.8 1632.2,734.7 R21.2@1593,695.5 1563,665.5 1563,524 1529,490 1295,490 ; J103.1@1700,2387.88 1700,2320 v1(1719,2301) ; J25.1@1950,50 J25.2@1950,150 ; v1(2112.5,286) 2130.5,268 v1(2130.5,185.66) ; v1(2120.5,2129.75) 2120.5,2191.25 v1(2119.5,2192.25) 2180.78,2253.53 v1(2212.05,2253.53) 2243.59,2222 v1(2249,2222)
  GND Layer w12: v2(671.62,859.36) 841.74,859.36 J13.2@1069.38,1087
  Bottom Layer w8: v1(590,1429.73) 611.14,1408.59 748.12,1408.59 v1(779.81,1440.28) ; v1(1594,1443) 1712.61,1443 1747.97,1407.63 v1(1821.89,1407.63) ; v1(1630,2521.5) 1701.5,2521.5 1719,2504 v1(1719,2301)
  Bottom Layer w15: v1(1615.38,831.7) 1615.38,853.07 1621.31,859 v1(1800.45,859)
+5V: J1/J3.21 J10.1 J23.1 J23.2 J101.4 R12.2 R16.2 | length 5658.7
  Top Layer w8: R12.2@1410.5,347 R16.2@1479,347 1479,300 v1(1487,292)
  VCC Layer w16: J10.1@2050,850 2259,850 2260,849 ; 2259.28,552.72 2260,552
  VCC Layer w20: J1/J3.21@350,2150 555,2355 555,2362.49 ; J101.4@555,2585 555,2362.49 ; J23.1@1850,50 J23.2@1850,150 1936,236 2235,236 2260,261 2260,552 2260,849 2260,2158 2055.51,2362.49 555,2362.49
  Bottom Layer w8: v1(1487,292) 1528,292 1589,353 1793,353 1850,296 J23.2@1850,150
AVCCOUT: C31.1 R36.1 R37.2 XDS2.1 | length 692.2
  Top Layer w8: v1(1410,3655) 1418.48,3655 1432.09,3641.39 XDS2.1@1482.2,3641.39 ; R36.1@1717,3423.62 R37.2@1717,3496 1717,3498.89 1693.32,3522.58 v1(1693.32,3588.31) C31.1@1717,3612
  Bottom Layer w8: v1(1410,3655) 1410,3688 1418,3696 1657.64,3696 1693.32,3660.32 v1(1693.32,3588.31)
BSL_INVOKE: IC2.1 J101.17 XDS1.42 | length 1103.5
  Top Layer w8: XDS1.42@951.15,3225.64 1005.39,3225.64 v1(1009.88,3230.13) ; v1(1219.88,3160.34) 1225.91,3154.31 1225.91,2714.09 J101.17@1255,2685 ; v1(1460.08,2810) 1475.52,2794.56 IC2.1@1491.99,2794.56
  Bottom Layer w8: v1(1009.88,3230.13) 1150.09,3230.13 v1(1219.88,3160.34) ; J101.17@1255,2685 1321.53,2685 1387,2750.47 1387,2782.76 1414.24,2810 v1(1460.08,2810)
CANRX: J26.3 R65.1 | length 950.4
  Top Layer w10: J26.3@1650,50 1600,100 1600,240 1625.8,265.8 1625.8,645.8 1721,741 1721,928.42 R65.1@1721.84,929.25
CANTX: J26.1 R64.1 | length 975.9
  Top Layer w10: J26.1@1563,50 J26.1@1550,50 1500,100 1500,167 1606.03,273.03 1606.03,654.6 1650.84,699.4 R64.1@1650.84,929.76
DCDCCAL0: R39.1 XDS2.12 | length 382.2
  Top Layer w8: XDS2.12@1631.8,3641.39 1660,3669.58 1660,3725 1672,3737 1731,3737 1873.8,3594.2 R39.1@1882.76,3594.2
DCDCCAL1: R38.1 XDS2.2 | length 846.7
  Top Layer w8: v1(1421.09,3615.8) XDS2.2@1482.2,3615.8 ; v1(1819.88,3505) 1840.88,3484 R38.1@1883.38,3484
  Bottom Layer w8: v1(1421.09,3615.8) 1401.2,3615.8 1380.01,3636.99 1380.01,3715.01 1390,3725 1685.86,3725 1819.88,3590.97 v1(1819.88,3505)
DCDCCAL2: R40.1 XDS2.11 | length 398.5
  Top Layer w8: XDS2.11@1631.8,3615.8 1652.8,3615.8 1685,3648 1685,3700 1693,3708 1729,3708 1750,3687 1750,3671.76 R40.1@1882.76,3539
DCDCIO0: XDS1.5 XDS2.4 | length 1301.6
  Top Layer w8: XDS1.5@466.9,3024.85 466.9,3131.9 550,3215 v1(620,3215) ; v1(1330.35,3535) 1359.97,3564.61 XDS2.4@1482.2,3564.61
  Bottom Layer w8: v1(620,3215) 641.3,3215 961.3,3535 v1(1330.35,3535)
DCDCIO1: XDS1.6 XDS2.5 | length 1268.8
  Top Layer w8: XDS1.6@482.65,3024.85 482.65,3065.15 ; 482.77,3065.15 482.77,3065.27 592.5,3175 v1(620,3175) ; v1(1479,3494) 1484.42,3494 XDS2.5@1518.61,3528.2
  Bottom Layer w8: v1(620,3175) 645,3175 965,3495 966,3494 v1(1479,3494)
DCDCPULSE: R47.2 XDS1.127 XDS2.3 | length 2033.7
  Top Layer w8: XDS1.127@344.85,3099.65 388.15,3099.65 543.5,3255 v1(620,3255) ; v1@1356,3619 1385.08,3589.92 1481.91,3589.92 XDS2.3@1482.2,3590.2 ; v1(1819.88,3795) 1879.38,3795 R47.2@1883.38,3791
  Bottom Layer w8: v1(620,3255) 640,3255 984,3599 1336.53,3599 v1(1356,3618.47) 1356,3733 1373,3750 1774.88,3750 v1(1819.88,3795)
DCDCRST: C35.1 R45.1 TP1.1 XDS1.11 XDS2.9 | length 1694.9
  Top Layer w8: XDS1.11@561.39,3024.85 561.39,3069.39 593.5,3101.5 v1(691,3101.5) ; R45.1@1475.62,3271 C35.1@1475.62,3217 1572,3217 TP1.1@1601,3246 1649.75,3294.75 1649.75,3546.66 XDS2.9@1631.8,3564.61
  Bottom Layer w8: v1(691,3101.5) 720.4,3130.9 1485.9,3130.9 TP1.1@1601,3246
DCDCTEST: R46.2 TP3.1 XDS1.27 XDS2.10 | length 1535.8
  Top Layer w8: v1(800,3103) 800,3090.3 813.35,3076.95 XDS1.27@813.35,3024.85 ; R46.2@1475.62,3163 1584,3163 TP3.1@1601,3146 1674,3219 1674,3563.34 1647.13,3590.2 XDS2.10@1631.8,3590.2
  Bottom Layer w8: v1(800,3103) 1558,3103 TP3.1@1601,3146
GND: C1.2 C2.2 C3.2 C4.2 C6.2 C7.2 C9.1 C10.1 C11.1 C12.1 C45.2 C47.2 C48.2 C49.2 C50.2 C51.2 C52.2 D1.1 J1/J3.22 J2/J4.20 J10.2 J10.3 J11.2 J11.3 J12.5 J18.1 J24.1 J24.2 J26.2 J26.4 J101.2 J103.3 J103.5 J103.7 J103.9 LED2.1 LED2.2 LED2.3 MSP1.41 P1.2 P1.3 P1.4 P1.5 R3.1 R8.2 R14.1 R67.1 R68.1 R70.1 RT1.1 S1.1 S1.2 S2.1 S2.2 S2.4 S3.1 S3.2 S3.3 U1.4 U2.4 Y2.2 Y2.4 | length 6449.1
  Top Layer w8: v1(800,1610.07) 830.07,1580 R67.1@851.5,1580 ; C7.2@914.5,1652 902,1664.5 R3.1@902,1716.85 928.45,1743.3 v1(950.5,1743.3) ; LED2.3@989.43,393.46 LED2.1@989.43,450.54 989.43,464.97 v1(1000,475.54) ; v1(1500,2560) 1500,2557.01 U1.4@1517.93,2539.08 ; C6.2@1669.62,1595 1692.44,1595 1706,1581.44 1706,1518 v1(1698,1510) 1698,1494.82 R8.2@1678.18,1475 ; v1(1908,466) 1939,435 D1.1@1939,409.52 ; v2(2030,4132) 2030,4041 2053.13,4017.87 2146.29,4017.87 2280,3884.17 2280,2610.57 S2.2@2236.31,2566.87 2186.11,2516.68 S2.4@2165.44,2516.68
  Top Layer w10: RT1.1@550,1077.3 v1(550,1109.72) ; v1(823.03,1138) 821,1140.03 821,1365.84 868.38,1413.21 ; C3.2@868.38,1385.27 868.38,1413.21 ; C4.2@868.38,1444 868.38,1413.21
  Top Layer w12: 1244.84,1330.57 MSP1.41@1244.84,1373.59
  Top Layer w15: R70.1@67.02,457.99 111.02,413.99 U2.4@219.32,413.99 230,403.31 P1.2@230,250 P1.3@230,50 P1.4@430,50 430,147.97 ; P1.5@430,250 430,147.97 ; 432.03,150 430,147.97 ; C2.2@1191.28,1277 1191.28,1279.93 1225.93,1279.93 1244.84,1298.84 1244.84,1330.57 ; Y2.2@1448.05,1243.5 1460.5,1243.5 1523.5,1180.5 Y2.4@1534.66,1180.5 ; C10.1@1483.62,1105 1483.62,1129.46 Y2.4@1534.66,1180.5 ; v2(1615,1133) C12.1@1615,1194.38 1548.54,1194.38 Y2.4@1534.66,1180.5
  Top Layer w16: S1.2@63.47,2301.85 151.8,2301.85 219,2369.05 R14.1@219,2399 ; S1.1@63.47,2567.6 80.87,2585 J101.2@455,2585 ; v2(1650.69,4134.31) S3.2@1702.13,4134.31 ; v2@1752.32,3985.32 v2(1752,3985) v2(1920,3985) ; S3.3@1920,4061.12 S3.3@1917.68,4063.44 1917.68,4084.11 S3.1@1967.87,4134.31 v2@2030,4134.31
  Top Layer w20: C2.2@1191.28,1277 1177.5,1263.22 C1.2@1177.5,1217 1140.45,1179.95 1140.45,1142.82 1171.27,1112 1279,1112 1292.34,1125.34 1292.34,1158 ; C9.1@1261.62,1158 1292.34,1158 ; C11.1@1323.72,1158.65 1323.07,1158 1292.34,1158 ; J103.3@1750,2387.88 J103.5@1800,2387.88 ; v1(1779.88,2289.97) 1800,2310.09 J103.5@1800,2387.88 ; J103.9@1900,2387.88 J103.7@1850,2387.88 J103.5@1800,2387.88
  GND Layer w40: 523.59,805.5 524,726
  Bottom Layer w10: 550,984.75 v1(550,1109.72)
  Bottom Layer w16: v2(1650.69,4134.31) 1650.69,4086.31 v2(1752,3985) ; v2(1920,3985) 2030,4095 v2(2030,4132)
  other v1: 89.87,270 290,490.19 204.02,628 660,710.04 470.5,720 50,1050.25 2169.5,1170 1287.41,1606 1084.35,2057.25 1194.92,2059.25 789.77,2080.75 748.04,2259 1279.3,2275 1422.24,2275 990,2278 1126.96,2280.64 1909.91,2290
  other v2: 1140,989.5 1140,1039.75 1140,1090
HOSTSCL: R42.1 XDS1.49 XDS2.7 | length 1051.7
  Top Layer w8: v1(870,3325.09) 880.78,3335.87 XDS1.49@951.15,3335.87 ; R42.1@1551,3423.98 1569.8,3442.77 XDS2.7@1569.8,3528.2
  Bottom Layer w8: v1(870,3325.09) 870,3285 879,3276 1463,3276 1571.5,3384.5 v1(1571.5,3448.35)
HOSTSDA: R41.1 XDS1.50 XDS2.8 | length 1241.2
  Top Layer w8: v1(880,3375.35) 903.73,3351.62 XDS1.50@951.15,3351.62 ; XDS2.8@1595.39,3528.2 v1(1595.39,3475) 1613,3457.39 R41.1@1613,3424.62
  Bottom Layer w8: v1(880,3375.35) 837.08,3332.44 837.08,3278.92 858,3258 1477.15,3258 1620.02,3400.87 1620.02,3450.37 v1(1595.39,3475)
IRSTN: R33.1 TP9.1 | length 937.9
  Top Layer w8: TP9.1@50,3335 145,3335 v1(160,3350) ; v1(687,3745) 691.24,3745 R33.1@718.87,3772.62
  Bottom Layer w8: v1(160,3350) 238,3428 515.62,3428 690,3602.38 687,3605.38 v1(687,3745)
ITCK: R92.2 TP6.1 XDS1.100 | length 340.5
  Top Layer w8: TP6.1@50,3635 104,3581 R92.2@142,3581 198.15,3524.85 XDS1.100@344.85,3524.85
ITDI: TP8.1 XDS1.98 | length 411.7
  Top Layer w8: TP8.1@50,3435 70,3415 v1(160,3415) ; v1(280,3575) 298.65,3556.35 XDS1.98@344.85,3556.35
  Bottom Layer w8: v1(160,3415) 179,3415 211,3447 211,3506 v1(280,3575)
ITDO: TP7.1 XDS1.97 | length 424.3
  Top Layer w8: TP7.1@50,3535 130,3455 v1(160,3455) ; v1(300,3605) 332.91,3572.09 XDS1.97@344.85,3572.09
  Bottom Layer w8: v1(160,3455) 183,3478 183,3513 275,3605 v1(300,3605)
ITMS: R91.2 TP5.1 XDS1.99 | length 417.2
  Top Layer w8: TP5.1@50,3735 90.62,3694.38 R91.2@142,3694.38 173,3663.38 173,3592 224.4,3540.6 XDS1.99@344.85,3540.6
LINRX: J26.6 R63.1 | length 945.4
  Top Layer w10: J26.6@1750,150 1965,365 1965,754.59 R63.1@1790.84,928.76 R63.1@1787,924.92
LINTX: J26.5 R62.1 | length 1029.5
  Top Layer w10: J26.5@1750,50 1800,100 1800,164 1987,351 1987,768.73 1862.84,892.9 R62.1@1862.84,928.76 R62.1@1862,927.92
NetC3_1: C3.1 C4.1 MSP1.32 | length 156.3
  Top Layer w8: C3.1@915.62,1385.27 C4.1@915.62,1444 921.98,1450.36 MSP1.32@1010.59,1450.36
NetC5_1: C5.1 J16.1 R1.2 | length 279.6
  Top Layer w10: C5.1@1676.38,387.54 1676.38,441.87 R1.2@1681.5,447 1665,463.5 1665,596 J16.1@1709,640
NetC5_2: C5.2 D1.2 J17.1 R1.1 | length 451.1
  Top Layer w10: C5.2@1723.62,387.54 1723.62,426.13 R1.1@1744.5,447 1863.53,447 ; J17.1@1809,640 1863.53,585.47 1863.53,447 ; D1.2@1889.79,409.52 1889.79,420.74 1863.53,447
NetC13_1: C13.1 R28.2 XDS1.96 | length 217.1
  Top Layer w8: R28.2@254.62,3720 C13.1@254.62,3667 290.47,3631.15 XDS1.96@403.91,3631.15
NetC20_1: C20.1 R31.1 R33.2 XDS1.70 | length 209.4
  Top Layer w8: R33.2@718.87,3725.38 828,3725.38 813.35,3710.73 XDS1.70@813.35,3631.15
NetC23_1: C23.1 C24.1 C25.1 XDS1.87 XDS1.115 | length 684.7
  Top Layer w8: C25.1@254.62,3160 253.62,3161 C24.1@253.62,3213 C23.1@253.62,3266 281.37,3266 304,3288.63 XDS1.115@344.85,3288.63 433.63,3288.63 545.64,3400.64 XDS1.87@545.64,3631.15
NetC26_1: C26.1 C27.1 IC5.3 R34.1 XDS1.9 | length 425.8
  Top Layer w8: XDS1.9@529.89,3024.85 529.89,2972.11 580.4,2921.6 R34.1@580.4,2913.26 C26.1@638,2913.26 C27.1@695,2913.26 825.74,2913.26 838.79,2900.21 IC5.3@838.79,2870.75
NetC28_1: C28.1 R35.1 XDS1.68 | length 340.6
  Top Layer w8: XDS1.68@844.85,3631.15 844.85,3600.15 854,3591 944,3591 1031,3678 C28.1@1062.38,3678 1062.38,3729.38 R35.1@1061.76,3730
NetC29_1: C29.1 XDS1.88 Y3.3 | length 227.2
  Top Layer w8: XDS1.88@529.89,3631.15 529.89,3664.05 553,3687.16 553,3734.17 593.33,3774.5 Y3.3@598.31,3774.5 598.31,3826.66 C29.1@598,3826.97
NetC30_1: C30.1 XDS1.89 Y3.1 | length 140.7
  Top Layer w8: C30.1@452.72,3712.38 453.6,3711.5 Y3.1@511.69,3711.5 514.14,3709.06 XDS1.89@514.14,3631.15
NetC34_1: C34.1 R43.1 R44.2 XDS2.6 | length 250.2
  Top Layer w8: R43.1@1428.38,3326 1428.38,3331.76 R44.2@1475.62,3379 C34.1@1475.62,3432 1475.62,3446.62 1544.2,3515.2 XDS2.6@1544.2,3528.2
NetC48_1: C48.1 R75.2 R76.1 | length 161.2
  Top Layer w10: R76.1@1250,2081.5 1250,2158.5 R75.2@1240,2168.5 1282.73,2168.5 C48.1@1310,2168.5
NetC49_1: C49.1 R77.2 R78.1 | length 157.4
  Top Layer w10: R77.2@1100,2168.5 1139,2168.5 ; R78.1@1140,2081.5 1140,2167.5 1139,2168.5 ; C49.1@1170,2168.5 1139,2168.5
NetC50_1: C50.1 R79.2 R80.1 | length 170.8
  Top Layer w10: R79.2@820,2168.5 859,2168.5 ; 860,2167.5 859,2168.5 ; R80.1@920,2081.5 920,2138.5 C50.1@890,2168.5 859,2168.5
NetC51_1: C51.1 R81.2 R82.1 | length 156.3
  Top Layer w10: R82.1@1379.84,2082.25 1379.84,2168.34 R81.2@1380,2168.5 C51.1@1450,2168.5
NetC52_1: C52.1 R83.2 R84.1 | length 157
  Top Layer w10: R83.2@960,2168.5 C52.1@1030,2168.5 R84.1@1030,2081.5
NetC54_1: C54.1 IC3.1 R90.2 USB2.6 USB2.7 USB2.8 USB2.9 USB2.10 USB2.11 | length 1198.2
  Top Layer w8: v1(250,3843) 357.14,3843 IC3.1@407.32,3893.17
  Top Layer w16: USB2.10@294.58,4103 294.58,4071.01 USB2.11@353.14,4012.45 353.14,4028.5 405,4080.35 405,4094.82 USB2.9@413.18,4103 USB2.8@487,4103 487,4085.31 547.04,4025.27 USB2.6@547.04,4012.45 ; USB2.7@605.6,4103 605.6,4071.01 USB2.6@547.04,4012.45 ; C54.1@680.76,4060 R90.2@680.76,3994 565.49,3994 USB2.6@547.04,4012.45
  Bottom Layer w8: v1(250,3843) 250,4058.42 USB2.10@294.58,4103
NetD2_1: D2.1 D2.2 R47.1 T2.1 | length 234.7
  Top Layer w12: R47.1@1930.62,3791 1997.14,3791 D2.2@1997.6,3790.54 ; T2.1@1996.6,3674.59 1997.6,3675.59 D2.2@1997.6,3790.54 ; D2.1@1997.6,3841.72 D2.2@1997.6,3790.54
NetD2_3: D2.3 R48.1 T1.1 T2.3 | length 343.5
  Top Layer w8: D2.3@2072.4,3816.13 2072.4,3727 ; T1.1@2154,3649 T2.3@2071.4,3649 2072.4,3650 2072.4,3727 ; R48.1@2165.38,3726 2073.4,3726 2072.4,3727
NetD3_3: D3.3 L1.1 T1.3 | length 318.9
  Top Layer w24: L1.1@2228.8,3494.06 2228.8,3558 T1.3@2228.8,3623.41
  Top Layer w25: D3.3@2071.4,3493 2071.4,3499.33 2130.07,3558 2228.8,3558 ; L1.1@2227.74,3493 L1.1@2228.8,3494.06
NetJ1/J3_3: J1/J3.3 J14.2 | length 455.5
  Bottom Layer w8: J1/J3.3@250,1950 292.39,1992.39 510.15,1992.39 553.54,1949 J14.2@670,1949
NetJ1/J3_26: J1/J3.26 R58.1 | length 288.1
  Top Layer w10: J1/J3.26@350,1650 376.8,1676.8 R58.1@627,1676.8
NetJ1/J3_29: J1/J3.29 J15.2 | length 320
  Bottom Layer w8: J1/J3.29@350,1350 J15.2@670,1350
NetJ4_2: J4.2 R4.1 | length 112.6
  Top Layer w8: R4.1@1157.38,437.26 1157.38,516.24 J4.2@1181.14,540
NetJ5_2: J5.2 R5.1 | length 104.1
  Top Layer w8: R5.1@790.16,448.05 790.16,510.78 J5.2@819.38,540
NetJ6_2: J6.2 R6.1 | length 117.8
  Top Layer w8: R6.1@857,448 857,477.62 J6.2@919.38,540
NetJ7_2: J7.2 R7.1 | length 133.2
  Top Layer w8: R7.1@924,448.62 928,448.62 J7.2@1019.38,540
NetJ8_2: J8.2 R14.2 S1.3 | length 230.6
  Top Layer w10: S1.3@134.34,2517.4 147.91,2517.4 246.35,2418.97 J8.2@324.12,2418.97
NetJ9_2: J9.2 R56.1 RT1.2 | length 273.6
  Top Layer w8: J9.2@370,950 534.71,950 R56.1@551,966.29 550,967.29 RT1.2@550,1051.7
NetJ9_3: J9.3 R57.2 | length 295.6
  Top Layer w8: J9.3@370,850 407,850 492.5,935.5 626.67,935.5 R57.2@629.17,933
NetJ19_1: J19.1 R18.1 | length 159.9
  Top Layer w10: R18.1@1295,758.5 1394.88,658.62 J19.1@1394.88,640
NetJ19_3: J19.3 R12.1 | length 112.6
  Top Layer w10: R12.1@1347.5,347 1347.5,392.63 J19.3@1394.88,440
NetJ20_1: J20.1 R21.1 | length 159.1
  Top Layer w10: J20.1@1494.88,640 1494.88,660.37 R21.1@1593,758.5
NetJ20_3: J20.3 R16.1 | length 112.5
  Top Layer w10: J20.3@1494.88,440 1541.99,392.88 R16.1@1541.99,347
NetLED1_2: LED1.2 R4.2 | length 82
  Top Layer w8: LED1.2@1159.26,374 1204.62,419.36 R4.2@1204.62,437.26
NetLED2_4: LED2.4 R5.2 | length 533.2
  Top Layer w8: R5.2@790.16,400.81 790.16,324.84 796,319 1069.36,319 1093,342.64 1093,423 1065.46,450.54 LED2.4@1042.57,450.54
NetLED2_5: LED2.5 R6.2 | length 386.4
  Top Layer w8: R6.2@857,400.76 857,339.49 861.62,334.87 1060.87,334.87 1077,351 1077,409.52 1064.52,422 LED2.5@1045.53,422 LED2.5@1046.53,421
NetLED2_6: LED2.6 R7.2 | length 237.9
  Top Layer w8: R7.2@924,401.38 924,356.38 928.38,352 1053.76,352 1061.76,360 1061.76,388.94 1057.24,393.46 LED2.6@1042.57,393.46
NetLED101_1: LED101.1 R29.1 | length 78.9
  Top Layer w8: LED101.1@136.65,2815.41 137.06,2815 R29.1@215.38,2815
NetLED102_1: LED102.1 R30.1 | length 79.9
  Top Layer w8: LED102.1@135.53,2734 R30.1@215.38,2734
NetR24_1: R24.1 XDS1.63 | length 140.4
  Top Layer w8: XDS1.63@951.15,3556.35 983.15,3556.35 1052.8,3626 R24.1@1062.75,3626
NetR25_1: R25.1 XDS1.62 | length 125.4
  Top Layer w8: XDS1.62@951.15,3540.6 1029.35,3540.6 R25.1@1062.75,3574
NetR26_1: R26.1 XDS1.61 | length 112.4
  Top Layer w8: XDS1.61@951.15,3524.85 1059.53,3524.85 R26.1@1062.38,3522
NetR27_1: R27.1 XDS1.60 | length 127.8
  Top Layer w8: XDS1.60@951.15,3509.1 1023.65,3509.1 R27.1@1062.75,3470
NetR29_2: R29.2 XDS1.3 | length 282.2
  Top Layer w8: R29.2@262.62,2815 263.91,2815 435.4,2986.5 XDS1.3@435.4,3024.85
NetR30_2: R30.2 XDS1.4 | length 404.9
  Top Layer w8: R30.2@262.62,2734 324,2734 363.31,2773.31 363.31,2874.31 451.15,2962.15 XDS1.4@451.15,3024.85
NetR32_2: R32.2 XDS1.59 | length 142.4
  Top Layer w8: XDS1.59@951.15,3493.35 987.02,3493.35 R32.2@1062.38,3418
NetR52_2: R52.2 T2.2 | length 71.4
  Top Layer w8: R52.2@1938.5,3655.41 1970.5,3623.41 T2.2@1996.6,3623.41
NetR68_2: R68.2 R69.1 U2.6 | length 172.4
  Top Layer w15: U2.6@426.01,463.99 426.84,463.99 456.84,433.99 R68.2@516.01,433.99 R69.1@516.01,503.99
NetR69_2: R69.2 R72.1 U2.7 | length 210.9
  Top Layer w15: U2.7@426.01,513.99 456.01,513.99 R72.1@516.01,573.99 579,511 R69.2@579,503.99
NetR70_2: R70.2 R71.1 U2.2 | length 165.1
  Top Layer w15: R70.2@130.01,457.99 R71.1@130.01,527.99 205.32,527.99 U2.2@219.32,513.99
NetR71_2: R71.2 R73.1 U2.1 | length 283.3
  Top Layer w15: R71.2@67.02,527.99 103.02,563.99 U2.1@219.32,563.99 277.51,622.19 R73.1@277.51,655.99
NetR73_2: R73.2 U2.5 | length 277.9
  Top Layer w15: R73.2@340.5,655.99 340.5,498.66 425.18,413.99 U2.5@426.01,413.99
NetR86_1: R86.1 USB2.5 | length 221.3
  Top Layer w16: USB2.5@501.27,3998.28 502.13,3997.42 502.13,3956.8 545.97,3912.96 R86.1@663.44,3912.96
NetR89_1: R89.1 USB2.1 | length 203.5
  Top Layer w16: USB2.1@398.05,3997.42 USB2.1@398.91,3998.28
  Top Layer w20: R89.1@260,3899.23 338,3899.23 398.91,3960.14 USB2.1@398.91,3998.28
PA0: J4.1 MSP1.33 R13.1 | length 1034
  Top Layer w8: v1(1040,1340.07) 1073.52,1373.59 MSP1.33@1087.36,1373.59 ; v1(1144.69,820.5) 1181.14,784.05 ; J4.1@1181.14,640 1181.14,784.05 ; R13.1@1348,830 1314.5,796.5 1193.84,796.5 1193.72,796.62 1181.14,784.05
  VCC Layer w8: v1(1040,1340.07) 1040,1333.33 1005.87,1299.2 1005.87,959.31 v1(1144.69,820.5)
PA0-: J19.2 J27.9 R13.2 | length 1391.1
  Top Layer w8: J19.2@1394.88,540 1437.13,582.25 1437.13,788.12 R13.2@1395.24,830
  GND Layer w8: J27.9@550,150 672,272 1229,272 1313,356 1313,458.12 J19.2@1394.88,540